# Altium PCB HU_MAIN_PCB_revA.PcbDoc (part 2 of 3)
Units mm, origin at the board's own origin, x right, y up, seen from the top; angles counter-clockwise.
Board outline 136.5 x 85 mm, 4 copper layers (Top Layer, Layer 1, Layer 2, Bottom Layer), stack 1.586 mm thick; 169 components, 126 nets, 634 pads, 1057 vias.
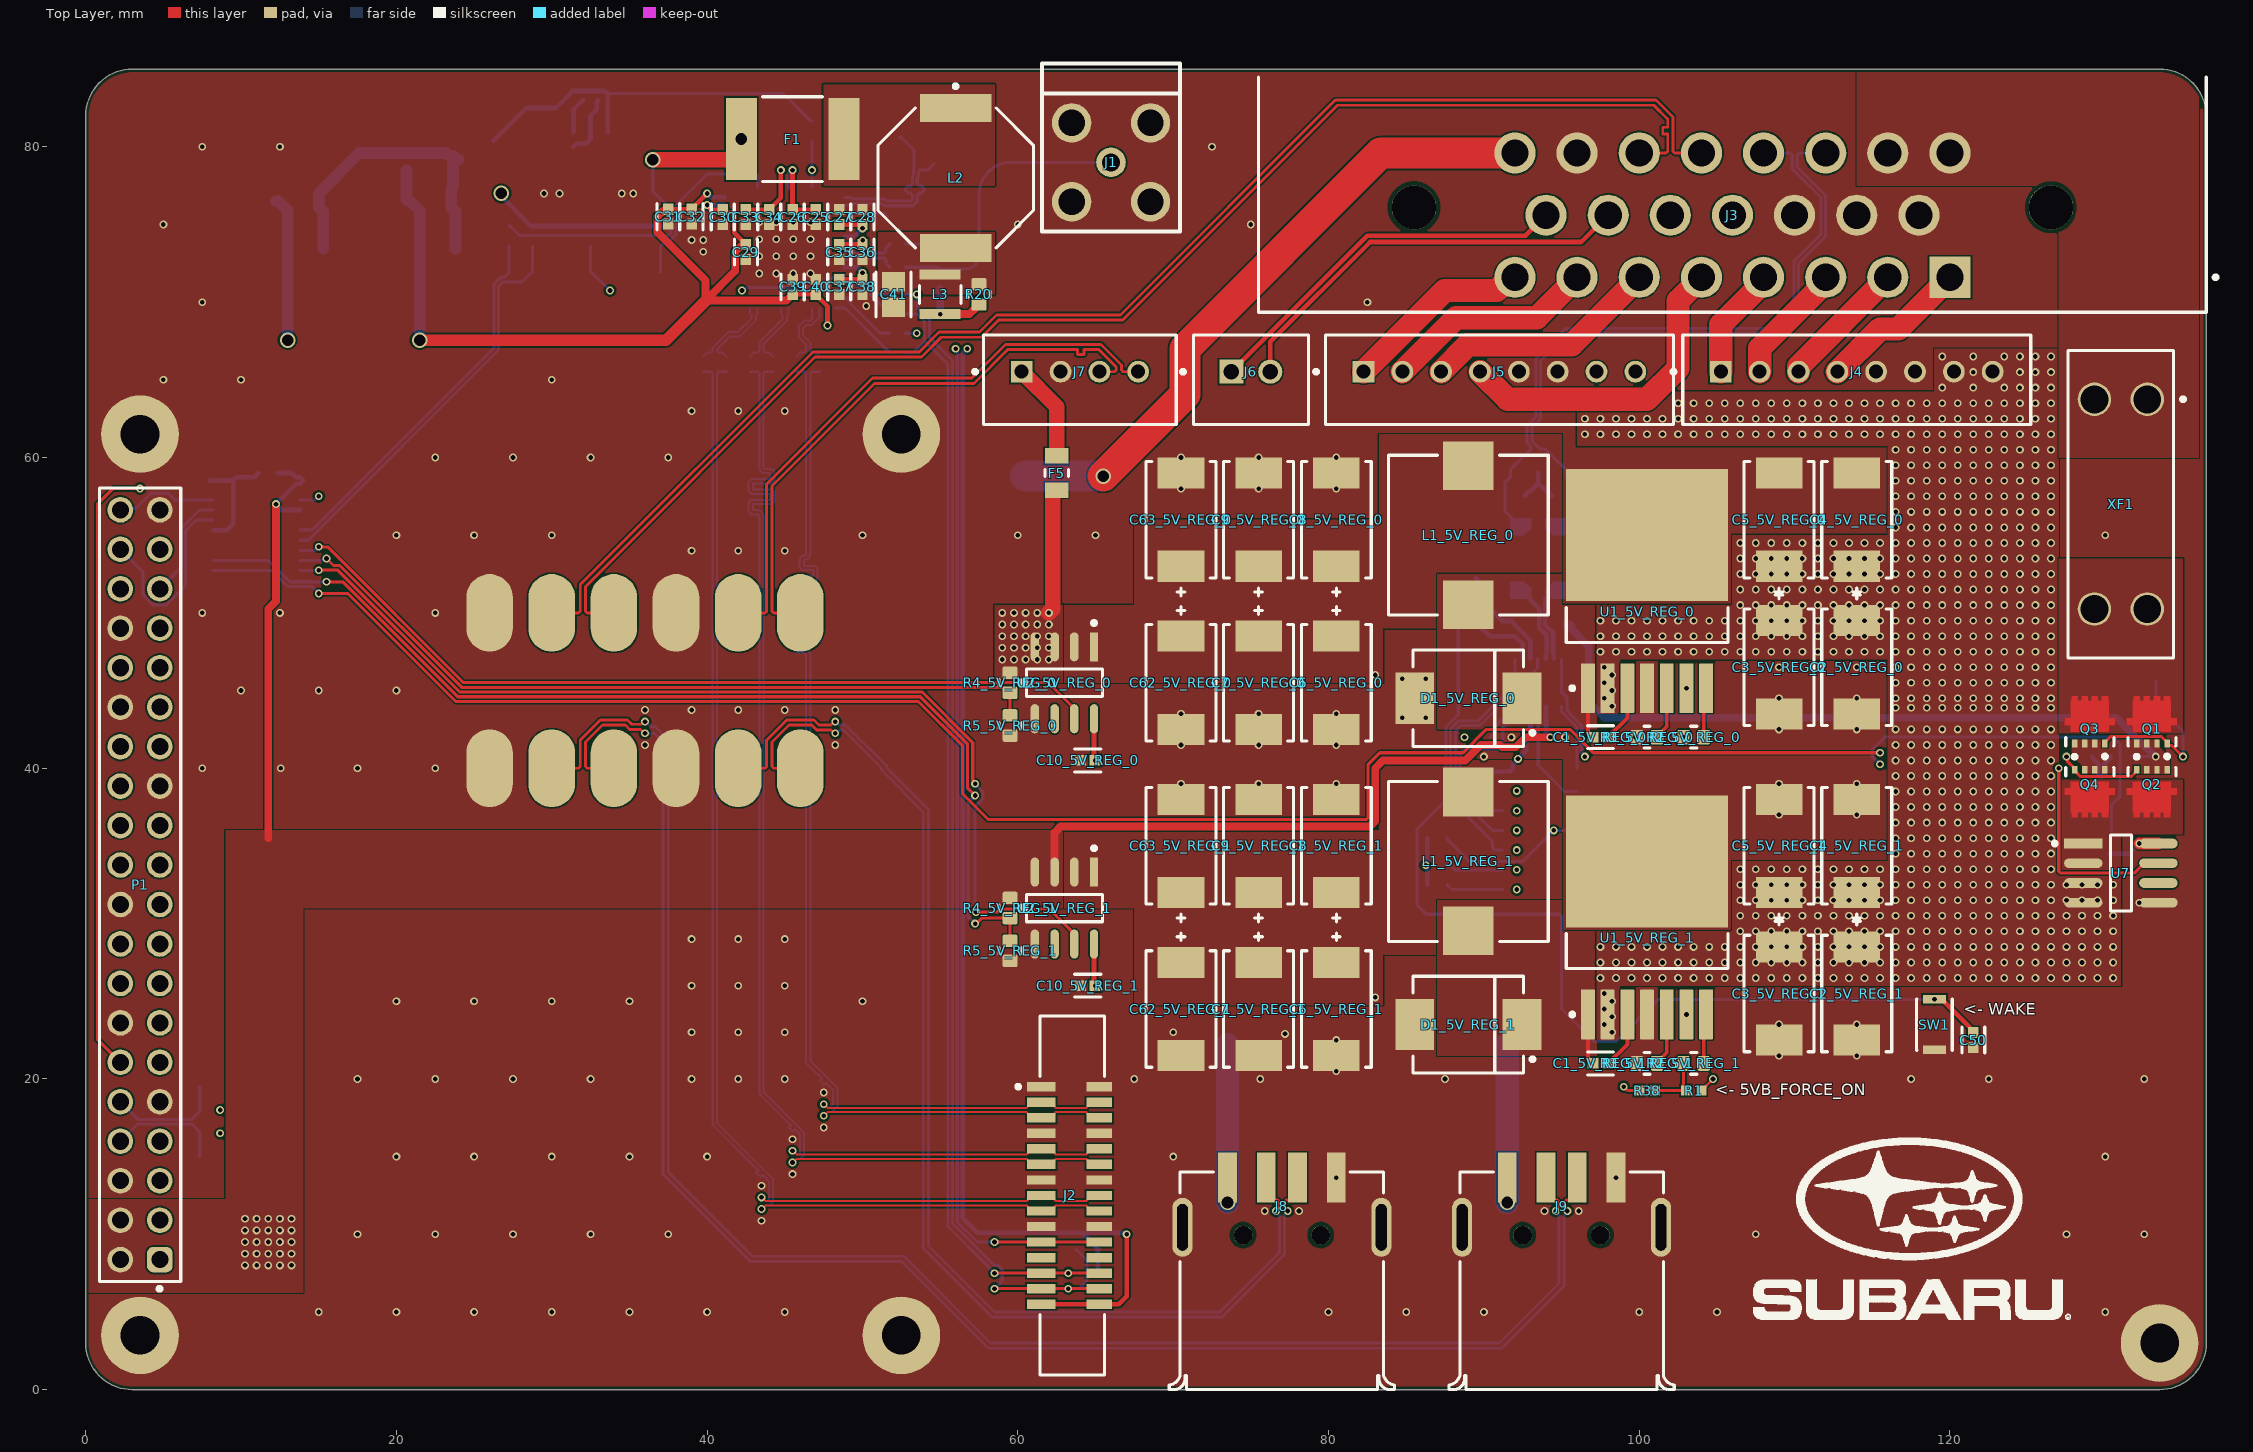
[diagram p0: Top Layer view]

## Part data (continued)
L4: library part CMP-11268-000007-1, "Fixed Inductors PFL1609 Low Profile 0.56 uH 20 % 1.4 A", Ambient Temperature Range High=+105°C, Ambient Temperature Range Low=-40°C, Inductance=0.56uH, Manufacturer=coilcraft, Package=PFL1609, Rms Current=1100mA, Saturation Current=710mA, Self Resonant Frequency=600MHz, Series Resistance=130mΩ, Test Frequency=7.9MHz, Tolerance=20%, Automotive=Yes, Automotive Grade="Grade 1", Category=Ind, ComponentLink2Description=Datasheet, ComponentLink2URL=https://www.coilcraft.com/pdfs/pfl1609.pdf, Composition=Wirewound, Core Material=Composite, Device Class L1="Passive Components", Device Class L2=Inductors, Device Class L3="Fixed Inductors", Height=0.95mm, Lead Free=Yes, Manufacturer Part Number=PFL1609-561MEW, Mouser Description="Fixed Inductors PFL1609 Low Profile 0.56 uH 20 % 1.4 A", Octopart=https://octopart.com/pfl1609-561mew-coilcraft-20329171, RoHS=TRUE, Shielding=true
L5: library part CMP-07251-000006-1, "CMC 51UH 200MA 2LN 2KOHM SMD", Case/Package=4532, Current=200mA, DC Resistance (DCR)=3.5R, Inductance=51uH, Insulation Resistance=10MR, Max Operating Temperature=125°C, Min Operating Temperature=-40°C, Package Quantity=1, Resistance=2kR, Self Resonant Frequency=100kHz, Tolerance=50%, Voltage Rating (DC)=50V, Contact Plating=Tin, Core Material=Ferrite, Current Rating=200mA, DC Current=200mA, Depth=3.4mm, Element Configuration=Dual, Height=0.118inch, Impedance=2kR, Lead Free="Lead Free", Length=4.5mm, Material=Steel, Max DC Current=200mA, Mount="Surface Mount", Number of Lines=2, Packaging="Tape and Reel", REACH SVHC="No SVHC", RoHS Compliant=Yes, Series=SRF4532, Termination=SMD/SMT, Test Frequency=100kHz, Width=0.126inch
L6: library part CMP-14484-001014-1, "SMD Power Inductors 4.7uH ±30% 3.1A 37.7mΩ", Case/Package=Nonstandard, Current Rating=3.1A, DC Resistance (DCR)=37.7mR, Inductance=4.7uH, Inductance Tolerance=30%, Max DC Current=3.3A, Max Operating Temperature=120°C, Min Operating Temperature=-25°C, Package Quantity=1500, Resistor Type=Wirewound, Self Resonant Frequency=28MHz, Test Frequency=100kHz, Core Material=Ferrite, Depth=5.1mm, Halogen Free="Halogen Free", Height=4mm, Height - Seated (Max)=0.161inch, Length=0.193inch, Mount="Surface Mount", Number of Pins=2, Packaging="Tape and Reel", Radiation Hardening=No, RMS Current (Irms)=3.1A, RoHS Compliant=Yes, Saturation Current=3.3A, Series=NR, Shielding=Shielded, Termination=SMD/SMT, Tolerance=30%, Width=4.9mm
P1: library part CMP-1502-01135-3, Color=Black, Contact Resistance=20mΩ, Current Rating=3A, Max Operating Temperature=105°C, Min Operating Temperature=-40°C, Operating Supply Voltage=250V, Connector Type="Male Pin", Contact Material=Copper, Contact Mating Length=5.9944mm, Contact Plating=Gold, Gender=Male, Height=8.89mm, Lead Pitch=2.54mm, Mount="Through Hole", NexarPartId=32855579, Number of Contacts=40, Number of Pins=40, Number of Positions=40, Number of Rows=2, Orientation=Vertical, Packaging=Bulk, Pitch=2.54mm, REACH SVHC=Unknown, RoHS=Compliant, Row Spacing=2.54mm, Termination=Solder, Voltage Rating=250V
Q1 Q2 Q3 Q4: library part CMP-013-00018-2, "Trans MOSFET P-CH 20V 22.1A 8-Pin PowerPAK 1212 EP T/R", Component Type=Standard, Design Item ID=CMP-013-00036-4, Pins=5, Source=SISH615ADN-T1-GE3.SchLib
Q5: library part CMP-2000-05968-1, "N-Channel Enhancement Mode Mosfet, 50 V, 200 mA, -55 to 150 degC, 6-Pin SOT-323, RoHS, Tape and Reel", Id - Continuous Drain Current=200mA, Manufacturer=DiodesIncorporated, Maximum Operating Temperature=+150C, Minimum Operating Temperature=-55C, Package / Case=SOT-323-3, Package Description="3-Pin Small Outline Transistor, Body 2 x 1.25 mm, Pitch 0.65 mm", Package Reference=SOT323, Pd - Power Dissipation=200mW, Rds On - Drain-Source Resistance=1.4Ohms, Vds - Drain-Source Breakdown Voltage=75V, Vgs - Gate-Source Voltage=20V, Brand=DiodesIncorporated, Channel Mode=Enhancement, Configuration=Single, Datasheet URL=http://www.diodes.com/_files/datasheets/ds30206.pdf, Datasheet Version="Rev. 11-2, 09/2013", Factory Pack Quantity=3000, Forward Transconductance - Min=0.1S, Height=1mm, Length=2.2mm, Manufacturer URL=http://www.diodes.com/, Mounting Style=SMD/SMT, Mounting Technology=SurfaceMount, Number Of Channels=1Channel, Packaging=Reel, Product=MOSFETSmallSignal, Product Category=MOSFET, RoHS=True, Series=BSS138, Technology=Si, Transistor Polarity=N-Channel, Transistor Type=1N-Channel, Type=EnhancementModeFieldEffectTransistor, Typical Turn-Off Delay Time=20ns, Typical Turn-On Delay Time=20ns, Unit Weight=0.000212oz, Width=1.35mm
R1 R8 R9 R11 R12 R38: library part CMP-009-00118-2, "READ THE NAME", Component Type=Standard, Design Item ID=CMP-009-00206-2, Pins=2, Source=0402jump.SchLib
R2_5V_REG_0 R2_5V_REG_1 R3_5V_REG_0 R3_5V_REG_1 R4_5V_REG_0 R4_5V_REG_1 R5_5V_REG_0 R5_5V_REG_1 R6 R7 R10 R13 R14 R15 R16 R17 R18 R19 R20 R21 R22 R23 R24 R25 R26 R27 R28 R29 R30 R31 R32 R33 R34 R35 R36 R37 R39 R40 R41: library part CMP-009-00002-14, "Resistor"
SW1: library part CMP-10040-000029-1, "SWITCH TACTILE SPST-NO 0.02A 15V", Current Rating=5A, Flammability Rating="UL94 V-0", Insulation Color=Black, Max Operating Temperature=85°C, Min Operating Temperature=-40°C, Operating Force=240gf, Actuator Type=Standard, Connector Type=USB, Contact Plating=Gold, Gender=Receptacle, Illumination Type=Non-Illuminated, Mechanical Life=500000Cycles, Mount="Surface Mount", Number of Contacts=24, Number of Ports=1, Packaging="Tape and Reel", Switch Function=Off-Mom, Switch Travel=0.13mm, Termination=Solder, Throw Configuration=SPST
U1_5V_REG_0 U1_5V_REG_1: library part CMP-0069-00189-3, "SIMPLE SWITCHER® High Efficiency 5A Step-Down Voltage Regulator, 7-pin TO-263, Pb-Free", Manufacturer="Texas Instruments", PackageTopMarking=NSUZXYTTE#*LM2678*S-5.0, PowerWise=N, Code_JEDEC=MO-169-AC, ComponentLink1Description="Datasheet URL", ComponentLink1URL=http://www.ti.com/general/docs/lit/getliterature.tsp?genericPartNumber=LM2678&fileType=pdf, CompType=Switcher, PackageDescription="TO-263, Molded, .400 x .390 x .180in Body, 7 Lead, .050in Pitch, Surface Mount", PackageReference=KTW0007B, PinCount=7, RoHS=Y
U2_5V_REG_0 U2_5V_REG_1: library part CMP-1557-00012-2, "SENSOR CURRENT HALL 12.5A AC/DC", Case/Package=SOIC, Current Sensing=12.5A, Frequency=100kHz, Max Operating Temperature=125°C, Max Supply Current=5.5mA, Max Supply Voltage=5.5V, Min Operating Temperature=-40°C, Min Supply Voltage=3V, Operating Supply Voltage=3.3V, Package Quantity=1, Quiescent Current=4mA, -3db Bandwidth=100kHz, Accuracy=5%, Bandwidth=100kHz, Height=1.5mm, Length=4.9mm, Linearity=1%, Number Of Channels=1, Number of Pins=8, Packaging="Tape and Reel", Polarity=Bidirectional, REACH SVHC="No SVHC", Response Time=4.6us, RoHS Compliant=Yes, Sensitivity=110mV/A, Series=-, Width=3.9mm
U3: library part CMP-015-00011-3, "Quad Tunneling GMSL2/1 to CSI-2 Deserializer"
U4: library part CMP-0244-00308-1, "Fixed Low Drop Positive Voltage Regulator, 1.8V, 4-Pin SOT-223, Tape and Reel", ComponentLink1Description="Manufacturer URL", ComponentLink1URL=http://www.st.com, ComponentLink2Description=Datasheet, ComponentLink2URL=http://www.st.com/internet/com/TECHNICAL_RESOURCES/TECHNICAL_LITERATURE/DATASHEET/CD00000544.pdf, DatasheetVersion=1/11/2011, PackageDescription="4-Pin SOT-223 Package, 6.5 x 3.5 mm Body, 2.3 mm Pitch, 7 mm Lead Span", PackageReference=SOT-223, PackageVersion=2010
U5: library part CMP-0244-00318-1, "Fixed Low Drop Positive Voltage Regulator, 1.2V, 4-Pin SOT-223, Tape and Reel", ComponentLink1Description="Manufacturer URL", ComponentLink1URL=http://www.st.com, ComponentLink2Description=Datasheet, ComponentLink2URL=http://www.st.com/internet/com/TECHNICAL_RESOURCES/TECHNICAL_LITERATURE/DATASHEET/CD00000544.pdf, DatasheetVersion=1/11/2011, PackageDescription="4-Pin SOT-223 Package, 6.5 x 3.5 mm Body, 2.3 mm Pitch, 7 mm Lead Span", PackageReference=SOT-223, PackageVersion=2010
U6: library part CMP-06298-000019-1, "IC CAN CONTROLLER SPI 14SOIC", RoHS Compliant=Yes
U7: library part CMP-1557-00015-2, "SENSOR CURRENT HALL 25A AC/DC", Case/Package=SOIC, Current Sensing=25A, Frequency=100kHz, Max Operating Temperature=125°C, Max Supply Current=5.5mA, Max Supply Voltage=5.5V, Min Operating Temperature=-40°C, Min Supply Voltage=3V, Operating Supply Voltage=3.3V, Package Quantity=1, Quiescent Current=4mA, -3db Bandwidth=100kHz, Accuracy=4%, Bandwidth=100kHz, Height=1.5mm, Length=4.9mm, Linearity=1%, Number Of Channels=1, Number of Pins=8, Packaging="Tape and Reel", Polarity=Bidirectional, REACH SVHC="No SVHC", Response Time=4.6us, RoHS Compliant=Yes, Sensitivity=55mV/A, Series=-, Width=3.9mm
U8: library part CMP-318-000000-2, "Automotive CAN FD transceiver with watchdog, bus diagnostics and partial networking via sele 14-SOT-23-THIN -40 to 150", Component Type=Standard, Design Item ID=CMP-015-00012-2, Pin Count=14, Source=TCAN1146DYYRQ1.SchLib
U10: library part CMP-0054-00372-2, "8-Channel, 50 kSPS to 200 kSPS, 8-Bit A/D Converter, 16-pin TSSOP, Pb-Free", Manufacturer="National Semiconductor", PackageTopMarking=NSUZXYTT*88S022*CIMT, PowerWise=Y, Code_JEDEC=MO-153-AB, ComponentLink1Description="ADC088S022 Datasheet", ComponentLink1URL=http://www.national.com/ds/AD/ADC088S022.pdf, ComponentLink2Description="ADC088S022 Web Page", ComponentLink2URL=http://www.national.com/pf/AD/ADC088S022.html, ComponentLink3Description="MTC16 Package Page", ComponentLink3URL=http://www.national.com/packaging/folders/mtc16.html, CompType="ADC IC", DatasheetVersion=Feb-2010, PackageDescription="Molded TSSOP, Jedec, 5 x 4.4 x 0.9mm Body, 16 Lead, 0.65mm Pitch", PackageReference=MTC16, PackageVersion="revD, Jun-2003", PinCount=16, RevisionNote="Component URLs added", RoHS=Y
U11: library part CMP-12757-000006-1, "IC REG BUCK 3.3V 2A TSOT26", Ambient Temperature Range High=+85°C, Ambient Temperature Range Low=-40°C, Manufacturer="Diodes Inc.", Max Junction Temp=+160°C, Max Supply Voltage=32V, Min Supply Voltage=3.8V, Nominal Supply Current=22uA, Output Current=2A, Output Voltage=3.3V, Package=TSOT26, Switching Frequency=1.1MHz, Temperature="to +160°C", Automotive=No, Category=IC, ComponentLink2Description=Datasheet, ComponentLink2URL=https://www.diodes.com/assets/Datasheets/AP63200-AP63201-AP63203-AP63205.pdf, Device Class L1="Integrated Circuits (ICs)", Device Class L2="Power Management ICs", Device Class L3="Voltage Regulators - Switching", Digikey Description="IC REG BUCK 3.3V 2A TSOT26", Footprint Url=https://www.diodes.com/assets/Package-Files/TSOT26.pdf, Height=1mm, Lead Free=Yes, Manufacturer Part Number=AP63203WU-7, Mouser Description="AP63203 Series 3.3 V 2 A SMT Fixed Low IQ Synchronous Buck - TSOT-26", Number of Outputs=1, Octopart=https://octopart.com/ap63203wu-7-diodes+inc.-98099550, Output Type=Fixed, RoHS=TRUE, Standoff Height=0.01mm, Switching Topology=Buck, Temperature Range High=+160°C
XF1: library part CMP-2000-05461-1, "FUSE HOLDER, PCB MOUNT, 500VAC, 20A, ROHS", Current Rating=30A, Manufacturer=Keystone-Electronics, Voltage=500V, Category=CircuitProtection, Contact Finish=TinNickel, Contact Material=Brass, Datasheet URL=http://datasheet.octopart.com/3557-2-Keystone-datasheet-15715937.pdf, Datasheet Version=Apr-13, Family=Fuseholders, For Use With/Related Products=ATC,ATO257,MINI897, Fuse Size="0.43\"Lx0.15\"Wx0.64\"H(10.92mmx3.81mmx16.25mm)", Fuse Type=Blade, Fuseholder Type=Block, Manufacturer URL=http://www.keyelco.com/, Mounting Type=PCB, Number of Circuits=1, Orientation=Vertical, Series=-, Termination Style=PCPin
Y1: library part CMP-2000-05733-3, "Crystal 25MHz ±20ppm (Tol) ±30ppm (Stability) 18pF FUND 60Ω 4-Pin SMD T/R", Case/Package=CSMD, ESR (Equivalent Series Resistance)=60R, Frequency=25MHz, Frequency Stability=30ppm, Frequency Tolerance=20ppm, Load Capacitance=18pF, Max Operating Temperature=85°C, Min Operating Temperature=-40°C, Operating Frequency="25 MHz", Package Quantity=1000, Depth=2.5mm, Height=0.039inch, Lead Free="Lead Free", Length=3.2mm, Mount="Surface Mount", Number of Pins=4, Packaging="Tape and Reel", Radiation Hardening=No, Series=ABM8G, Series Resistance=60R, Termination=SMD/SMT, Tolerance=20ppm, Width=0.098inch
Y2: library part CMP-27762-015817-1, "Crystal 20MHz ±20ppm (Tol) ±30ppm (Stability) 18pF FUND 80Ω 4-Pin SMD T/R", Case/Package=CSMD, ESR (Equivalent Series Resistance)=80R, Frequency=20MHz, Frequency Stability=30ppm, Frequency Tolerance=20ppm, Load Capacitance=18pF, Max Operating Temperature=85°C, Min Operating Temperature=-40°C, Package Quantity=1000, Depth=2.5mm, Height=1mm, Length=3.2mm, Mount="Surface Mount", Number of Pins=4, Packaging="Tape and Reel", Series=ABM8G, Termination=SMD/SMT, Tolerance=20ppm, Width=2.5mm

## Free pads (board coordinates)
  round 5 hole 2.5: 29(3.5,3.5) 29(3.5,61.5) 29(52.5,3.5) 29(52.5,61.5) 29(133.5,3)
  oval 3x5 smd: 30(26,40) 30(26,50) 30(38,40) 30(38,50) 31(30,40) 31(30,50) 31(34,50) 31(34,40) 31(42,40) 31(42,50) 31(46,50) 31(46,40)

## Via types
v1: diameter 0.5, hole 0.3, Top Layer to Bottom Layer, tented both sides, 1048 vias
v2: diameter 1, hole 0.75, Top Layer to Bottom Layer, tented both sides, 8 vias
v3: diameter 0.5, hole 0.3, Top Layer to Bottom Layer, 1 vias

## Nets (pads, with @x,y where several pads share a name; then routed paths per layer and width w, separated by ;. In a path a pad name is that pad's centre, name@x,y a point inside that pad or via, vN(x,y) a via of type N, cw(c..) or ccw(c..) an arc to the next point about the centre after c; other vN are vias at no path point)
3V3: C21.2 C23.2 C60.2 C61.2 L6.2 R13.2 R15.2 R16.2 R36.2 U4.3 U5.3 U11.1 | length 56.3
  Bottom Layer w0.2: 33.6,83.429 44.896,83.429 46.675,81.65 R13.2@46.75,81.65
  Bottom Layer w0.3: L6.2@26.25,80.4 28.35,82.5 30.25,82.5 31.338,83.588 33.44,83.588 33.6,83.429 U11.1@33.6,80.95 ; C60.2@26.674,77 26.674,76.899 28.673,74.9 R15.2@32.5,74.9 R16.2@37,74.9
  Bottom Layer w0.75: U4.3@15.3,73.45 15.3,75.811 15.021,76.089 15.021,77.021 17.6,79.6 23.208,79.6 23.381,79.427 23.647,79.427 C61.2@23.899,79.174 ; U5.3@23.8,73.45 23.8,75.811 23.521,76.089 C23.2@23.521,76.5 23.521,77.296 23.647,77.422 23.647,78.922 C61.2@23.899,79.174 ; C61.2@24,79.174 C61.2@23.899,79.174
  other v2: 26.75,77
5V_FB_5V_REG_0: C6_5V_REG_0.2 C7_5V_REG_0.2 C8_5V_REG_0.2 C9_5V_REG_0.2 C62_5V_REG_0.2 C63_5V_REG_0.2 L1_5V_REG_0.2 U1_5V_REG_0.6 U2_5V_REG_0.1 U2_5V_REG_0.2 | length 21.8
  Layer 1 w0.2: v1(83,46) 84.5,44.5 86.75,44.5 87.75,43.5 101.39,43.5 v1(103.04,45.15)
5V_FB_5V_REG_1: C6_5V_REG_1.2 C7_5V_REG_1.2 C8_5V_REG_1.2 C9_5V_REG_1.2 C62_5V_REG_1.2 C63_5V_REG_1.2 L1_5V_REG_1.2 U1_5V_REG_1.6 U2_5V_REG_1.1 U2_5V_REG_1.2 | length 22.3
  Layer 1 w0.2: v1(83,25.25) 86.25,22 100.89,22 v1(103.04,24.15)
5VA: C10_5V_REG_0.2 C10_5V_REG_1.2 C42.1 C45.1 C46.1 C47.1 C55.1 P1.2 P1.4 R1.2 R2_5V_REG_0.2 R4_5V_REG_1.2 R21.1 R22.1 R23.1 R35.1 U2_5V_REG_0.8 U2_5V_REG_1.3 U2_5V_REG_1.4 U2_5V_REG_1.8 U6.14 U7.8 U8.3 U8.5 U10.2 | length 245.6
  Top Layer w0.2: R1.2@104,19.25 v1(104.75,20)
  Top Layer w0.3: U2_5V_REG_1.8@64.905,28.684 64.905,26.074 v1(64.979,26) ; U2_5V_REG_0.8@64.905,43.184 64.905,40.574 v1(64.979,40.5)
  Top Layer w0.5: 11.75,35.5 11.75,50.25 12.25,50.75 v3(12.25,57) ; U2_5V_REG_1.3@62.365,33.316 62.365,35.865 62.75,36.25 82.65,36.25 83,36.6 83,40 83.5,40.5 88.8,40.5 89.8,41.5 91.025,41.5 91.175,41.35 92.041,41.35 92.691,42 v1(94.271,42)
  Top Layer w0.75: v1(132.179,35.155) U7.8@133.416,35.155
  Layer 1 w0.3: v1(86.25,33.75) 86.25,34.65 91.35,39.75 ; v1(94.271,42) 94.243,41.971 93.571,41.971 v1(92.2,40.6) 94.85,40.6 97,42.75 102.1,42.75 v1(102.85,42)
  Layer 1 w0.75: v1(64.979,26) v1(64.979,40.5) 88.25,40.5 89,39.75 91.35,39.75 v1(92.2,40.6)
  Layer 2 w0.2: 104.75,16 v1(104.75,20)
  Layer 2 w0.75: v1(64.979,26) 74.979,16 104.75,16 125,16 133.5,24.5 133.5,33.834 v1(132.179,35.155)
  Bottom Layer w0.3: v3(12.25,57) 12.625,56.625 U10.2@13.8,56.625 ; v3@12.288,57.054 13.548,58.314 13.814,58.314 14,58.5 14,58.543 13.814,58.729 13.521,58.729 13.25,59 R35.1@12.4,59 ; v1(86.25,33.75) 86.35,33.85 R21.1@86.35,35.5 ; R23.1@86.35,32.5 R22.1@86.35,33.75 ; C42.1@89,39.021 89.089,39.11 89.61,39.11 90.264,39.764 91.138,39.764 U6.14@91.184,39.81 ; U6.14@91.419,39.8 91.728,39.8 91.849,39.922 91.849,40.23 v1@92.2,40.581 ; v1(92.2,40.6) 92.714,41.114 92.714,41.985 C47.1@92.729,42 92.75,42 93,42.25 U8.5@93,43.957 ; U8.3@94,43.957 94,42.25 94.25,42 v1(94.271,42) ; C45.1@130.25,34.5 131.524,34.5 v1(132.179,35.155)
  other v1: 10.25,8 11,8 11.75,8 12.5,8 13.25,8 10.25,8.75 11,8.75 11.75,8.75 12.5,8.75 13.25,8.75 10.25,9.5 11,9.5 11.75,9.5 12.5,9.5 13.25,9.5 10.25,10.25 11,10.25 11.75,10.25 12.5,10.25 13.25,10.25 10.25,11 11,11 11.75,11 12.5,11 13.25,11
5VB: F2.2 F3.1 F4.1 F5.2 R4_5V_REG_0.2 U2_5V_REG_0.3 U2_5V_REG_0.4 | length 8.3
  Top Layer w1: v1(62,50) 62.25,50.25 62.25,57.9 F5.2@62.5,57.9
  other v1: 59,47 59.75,47 60.5,47 61.25,47 62,47 59,47.75 59.75,47.75 60.5,47.75 61.25,47.75 62,47.75 59,48.5 59.75,48.5 60.5,48.5 61.25,48.5 62,48.5 59,49.25 59.75,49.25 60.5,49.25 61.25,49.25 62,49.25 59,50 59.75,50 60.5,50 61.25,50

## Text inside footprints (layer, text, board x,y; h text height)
J8: Mechanical 2 "PCB Edge" at 74.8,-1.2 h0.81
J9: Mechanical 2 "PCB Edge" at 92.8,-1.2 h0.81
U8: Bottom 3D Body "*" at 94.3,44.509 h1.27 r270; Bottom Overlay "*" at 95.178,43.385 h1.27 r270